# Altium PCB Asserv_2.PcbDoc
Units mil, origin at the board's own origin, x right, y up, seen from the top; angles counter-clockwise.
Board outline 3740 x 1490 mil, 2 copper layers (Top Layer, Bottom Layer); 68 components, 62 nets, 269 pads, 23 vias.
Unrouted connection lines stored in the file: 47.
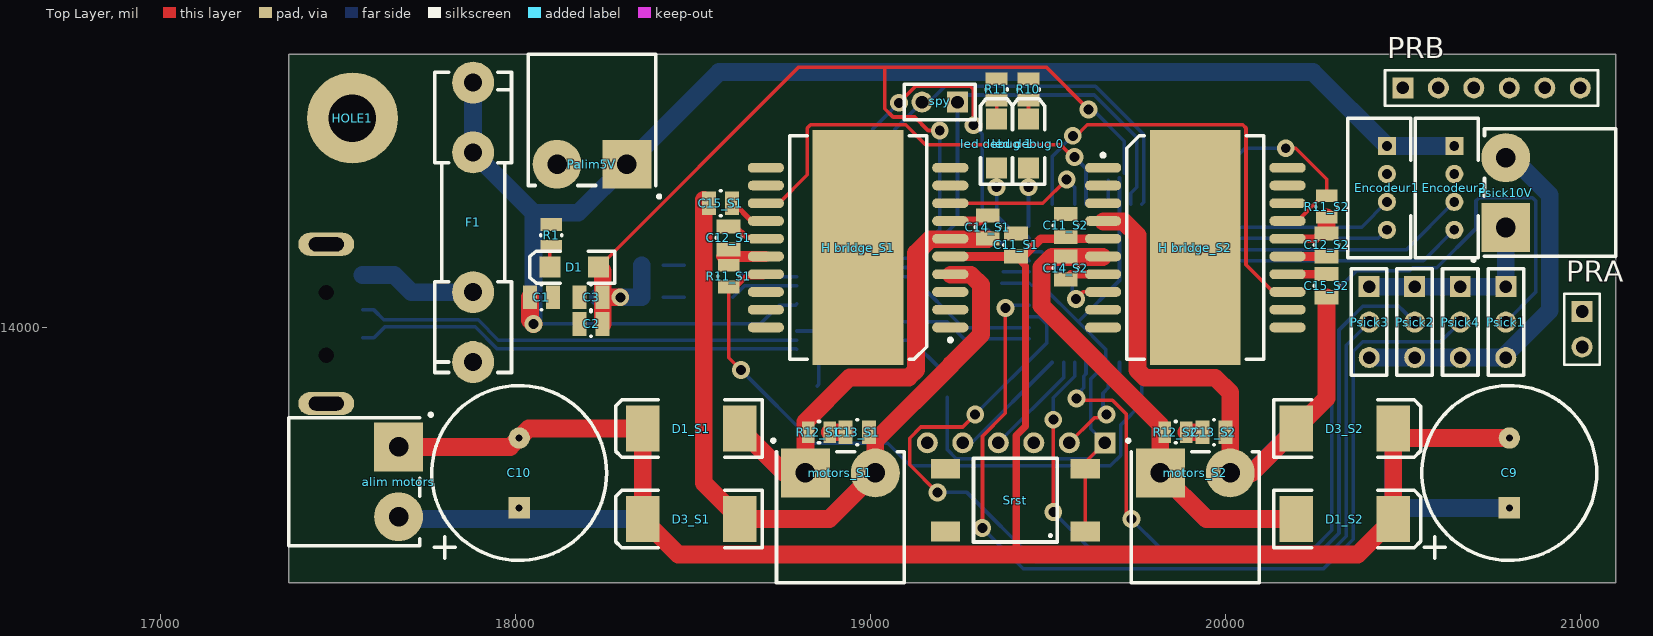
[diagram p0: Top Layer view]
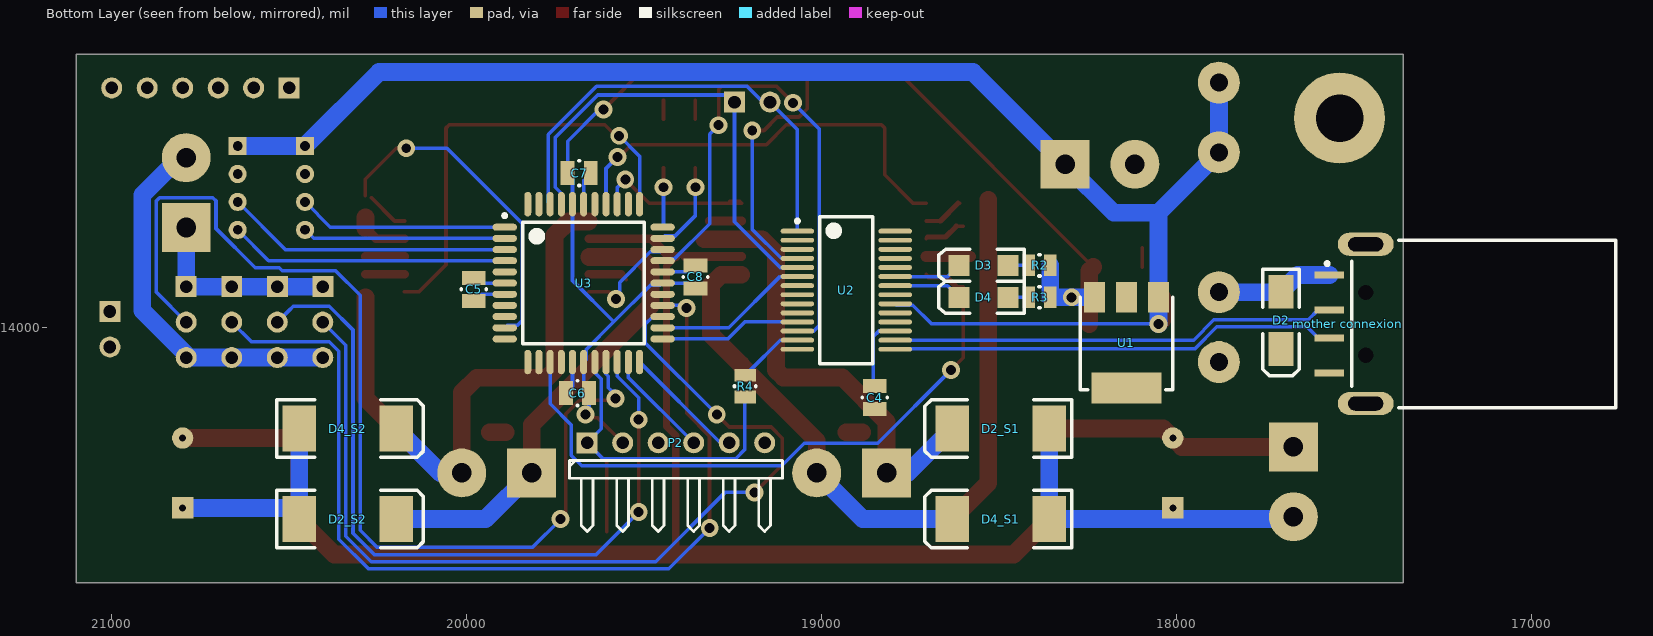
[diagram p1: Bottom Layer view, seen from below]

## Layer stack, top to bottom
Top Layer: signal copper 1.4
Dielectric: dielectric 12.6, FR-4, Dk 4.8
Bottom Layer: signal copper 1.4

## Board outline
17360,13280 21100,13280 21100,14770 17360,14770

## Design rules (kind name [scope] priority, off if disabled: settings)
Clearance [All] p1: gap=10
HoleSize [All] p1: absolutevalues=TRUE maxlimit=140 minlimit=1 maxpercent=80.000 minpercent=20.000
MinimumSolderMaskSliver [All] p1: minsoldermaskwidth=1
PolygonConnect [All] p1: connectstyle=Relief reliefconductorwidth=10 reliefentries=4 polygonreliefangle="90 Angle"
RoutingVias [All] p1: holewidth=28 width=50 viastyle="Through Hole" minholewidth=28 minwidth=50 maxholewidth=28 maxwidth=50
SilkToSilkClearance [All] p1: silktosilkclearance=1
SilkscreenOverComponentPads [All] p1: minsilkscreentomaskgap=1
SolderMaskExpansion [All] p1: expansion=4
Width [All] p1: maxlimit=100 minlimit=10 preferedwidth=10
24 further rules are at their usual default settings.

## Classes and differential pairs
channel class motors1-bridge: S1 S2
net class PWM[1..2]: PWM1 PWM2
net class DIRB[1..2]: DIRB1 DIRB2
net class DIRA[1..2]: DIRA1 DIRA2
component class S2: C11_S2 C12_S2 C13_S2 C14_S2 C15_S2 D1_S2 D2_S2 D3_S2 D4_S2 motors_S2 R11_S2 R12_S2
component class S1: C11_S1 C12_S1 C13_S1 C14_S1 C15_S1 D1_S1 D2_S1 D3_S1 D4_S1 "H bridge_S1" motors_S1 R11_S1 R12_S1
component class asserv1: "alim motors" C1 C2 C3 C4 C5 C6 C7 C8 C9 C10 D1 D2 D3 D4 Encodeur1 Encodeur2 F1 HOLE1 "led debug 0" "led debug 1" "mother connexion" P2 Palim5V PRA PRB Psick1 Psick2 Psick3 Psick4 Psick10V R1 R2 R3 R4 R10 R11 spy U1 U2 U3

## Components (designator, comment, footprint, x,y, rotation, side; value= is the part's Value field where it differs from the comment)
"alim motors" "Bornier" "Bornier male coude 2 voies" 17670,13565 r270 top
C1 "" C0805C 18040,14085 r0 top
C2 "" C0805C 18245,14010 r180 top
C3 "" C0805C 18245,14085 r180 top
C4 "" C0805C 18850,13770 r90 bottom
C5 "" C0805C 19980,14075 r90 bottom
C6 "" C0805C 19655,13815 r0 bottom
C7 "" C0805C 19715,14435 r180 bottom
C8 "" C0805C 19355,14110 r90 bottom
C9 "CAP" "Capacitor axial leaded" 20800,13590 r90 top
C10 "CAP" "Capacitor axial leaded" 18010,13590 r90 top
C11_S1 "CAP" C0805C 19410,14265 r270 top (schematic designator C11)
C11_S2 "CAP" C0805C 19550,14320 r270 top (schematic designator C11)
C12_S1 "CAP" C0805C 18600,14220 r90 top (schematic designator C12)
C12_S2 "CAP" C0805C 20285,14265 r270 top (schematic designator C12)
C13_S1 "CAP" C0805C 18930,13705 r0 top (schematic designator C13)
C13_S2 "CAP" C0805C 19935,13705 r0 top (schematic designator C13)
C14_S1 "CAP" C0805C 19330,14315 r270 top (schematic designator C14)
C14_S2 "CAP" C0805C 19550,14135 r90 top (schematic designator C14)
C15_S1 "CAP" C0805C 18610,14350 r180 top (schematic designator C15)
C15_S2 "CAP" C0805C 20285,14150 r270 top (schematic designator C15)
D1 "LED2" LED1206G 18165,14170 r180 top
D1_S1 "Diode" DSO-C2/X3.3 18495,13715 r180 top (schematic designator D1)
D1_S2 "Diode" DSO-C2/X3.3 20336.22,13460 r0 top (schematic designator D1)
D2 "ZENER/5.6V" DSO-C2/X1.8 17705,14020 r270 bottom
D2_S1 "Diode" DSO-C2/X3.3 18495,13715 r0 bottom (schematic designator D2)
D2_S2 "Diode" DSO-C2/X3.3 20335,13460 r180 bottom (schematic designator D2)
D3 "LED2" LED1206Y 18543.19,14175 r0 bottom
D3_S1 "Diode" DSO-C2/X3.3 18495,13460 r180 top (schematic designator D3)
D3_S2 "Diode" DSO-C2/X3.3 20336.22,13715 r0 top (schematic designator D3)
D4 "LED2" LED1206Y 18543.19,14085 r0 bottom
D4_S1 "Diode" DSO-C2/X3.3 18495,13460 r0 bottom (schematic designator D4)
D4_S2 "Diode" DSO-C2/X3.3 20335,13715 r180 bottom (schematic designator D4)
Encodeur1 "JST" B4B-PH-K-S 20455,14511.22 r270 top
Encodeur2 "JST" B4B-PH-K-S 20645,14511.22 r270 top
F1 "200mA" "Fuse Holder 5x20mm" 17880,14690 r270 top
"H bridge_S1" "L6201P" PowerSO20_M 18965,14225 r180 top (schematic designator "H bridge")
"H bridge_S2" "L6201P" PowerSO20_M 19915,14225 r0 top (schematic designator "H bridge")
HOLE1 "Hole" SCREW 17540,14590 r180 top
"led debug 0" "LED" LED1206R 19445,14518.19 r90 top
"led debug 1" "LED" LED1206R 19355,14518.19 r90 top
"mother connexion" "USB male" "USB SM2.5 Male" 17360,14010 r180 bottom
motors_S1 "Bornier" "Bornier male coude 2 voies" 18915,13590 r0 top (schematic designator motors)
motors_S2 "Bornier" "Bornier male coude 2 voies" 19915,13590 r0 top (schematic designator motors)
P2 "PICkit" HDR1X6H 19660,13675 r180 bottom
Palim5V "Header 2" "Bornier male coude 2 voies" 18215,14460 r180 top
PRA "portA" HDR1X2 21005,14045 r270 top
PRB "portB" HDR1X6 20500,14675 r0 top
Psick1 "capteurs sick" HDR1X3 20790,14115 r270 top
Psick2 "capteurs sick" HDR1X3 20533.33,14115 r270 top
Psick3 "capteurs sick" HDR1X3 20405,14115 r270 top
Psick4 "capteurs sick" HDR1X3 20661.67,14115 r270 top
Psick10V "alim sick" "Bornier male coude 2 voies" 20790,14380 r90 top
R1 "" C0805R 18100,14290 r270 top
R2 "" C0805R 18416.02,14175 r180 bottom
R3 "" C0805R 18416.02,14085 r180 bottom
R4 "" C0805R 19215,13865 r270 bottom
R10 "" C0805R 19445,14640 r90 top
R11 "" C0805R 19355,14640 r90 top
R11_S1 "RES" C0805R 18600,14175 r270 top (schematic designator R11)
R11_S2 "RES" C0805R 20285,14310 r90 top (schematic designator R11)
R12_S1 "RES" C0805R 18885,13705 r180 top (schematic designator R12)
R12_S2 "RES" C0805R 19890,13705 r180 top (schematic designator R12)
spy "Header 2" HDR1X2 19245,14635 r180 top
Srst "SPST-NO" SPST-NO 19605,13425 r90 top
U1 "LM2937IMP-3.3" SOT223 18050,14085 r0 bottom
U2 "FT232RL" SSOP-28_M 18930,14105 r180 bottom
U3 "DSPIC33FJ64MC804-I/PT" TQFP-PT44_N 19670,14125 r180 bottom

## Footprints (in the part's own frame and the unit in brackets; to place one, negate y for a bottom-side part, rotate by r counter-clockwise, add the part's x,y. Pads: shape width x height; smd on the part's side, far side on the other; paste and mask are expansions set on the pad)
B4B-PH-K-S [mm] "JST Header 4 pins Straight"
  rect 1.3x1.3 hole 0.7: 1(0,0)
  round 1.3 hole 0.7: 2(2,0) 3(4,0) 4(6,0)
  silkscreen extent -2,-2.8 8,1.7, body extent -1.95,-2.8 7.95,1.7, height 6
"Bornier male coude 2 voies" [mm] "Bornier male coude 2 voies 12A. Pas 5mm (model : CTB9350/2A) -- 3D FAUSSE"
  rect 3.5x3.5 hole 1.4: 1(-2.5,0)
  round 3.5 hole 1.4: 2(2.5,0)
  silkscreen extent -4.9,-7.87 4.57,2.41, body extent -4.2,-7.93 4.2,1.27, height 7.25
C0805C [mm]
  rect 1x1.7 smd: 1(0,0) 2(1.65,0)
  silkscreen extent 0.8,-0.89 0.85,0.89, body extent -0.21,-0.61 1.79,0.64, height 0.78
C0805R [mm]
  rect 0.9x1.55 smd: 1(0,0) 2(1.55,0)
  silkscreen extent 0.73,-0.76 0.81,0.76, body extent -0.24,-0.62 1.76,0.63, height 0.78
"Capacitor axial leaded" [mil] "height x diam 20mm x 12.5mm"
  rect 60x60 hole 19.68: 1(-98.43,0)
  round 60 hole 19.68: 2(98.43,0)
  silkscreen extent -246,-246 246,246, body extent -246,-246 244,246, height 788
DSO-C2/X1.8 [mm] "Diode; DO-214-AC/SMA; 2 C-Bend Leads; Body 5 x 2.7 mm, inc. leads (LxW)"
  rect 2.4x1.8 smd: A(2.05,0) K(-2.05,0)
  silkscreen extent -3.65,-1.3 3.95,1.3, body extent -2.74,-1.4 2.74,1.4, height 2.28
DSO-C2/X3.3 [mm] "DO-214-AB/SMC; 2 C-Bend Leads; Body 7.9 x 5.9 mm, inc. leads (LxW)"
  rect 2.4x3.3 smd: A(-3.475,0) K(3.475,0)
  silkscreen extent -5.07,-2.05 5.43,2.05, body extent -4.06,-3.15 4.06,3.15, height 2.67
"Fuse Holder 5x20mm" [mm] "Schurter Fuse Holder 0751.0110"
  round 3 hole 1.3: 1(0,0) 1(5,0) 2(15,0) 2(20,0)
  silkscreen extent -0.75,-2.75 20.75,2.75, body extent -0.51,-3.1 20.58,3.1, height 9.86
HDR1X2 [mm] "Connector; Header; 2 Position"
  rect 1.5x1.5 hole 0.9: 1(0,0)
  round 1.5 hole 0.9: 2(2.54,0)
  silkscreen extent -1.27,-1.27 3.81,1.27, body extent -1.17,-1.25 3.91,1.25, height 8.2
HDR1X3 [mm] "Connector; Header; 3 Position"
  rect 1.5x1.5 hole 0.9: 1(0,0)
  round 1.5 hole 0.9: 2(2.54,0) 3(5.08,0)
  silkscreen extent -1.27,-1.27 6.35,1.27, body extent -1.17,-1.25 6.45,1.25, height 8.2
HDR1X6 [mm] "Connector; Header; 6 Position"
  rect 1.5x1.5 hole 0.9: 1(0,0)
  round 1.5 hole 0.9: 2(2.54,0) 3(5.08,0) 4(7.62,0) 5(10.16,0) 6(12.7,0)
  silkscreen extent -1.27,-1.27 13.97,1.27, body extent -1.17,-1.25 14.07,1.25, height 8.2
HDR1X6H [mm] "Connector; Header; 6 Position; Right Angle"
  rect 1.5x1.5 hole 0.9: 1(0,0)
  round 1.5 hole 0.9: 2(2.54,0) 3(5.08,0) 4(7.62,0) 5(10.16,0) 6(12.7,0)
  silkscreen extent -1.27,-6.35 13.97,-1.27, body extent -1.17,-5.85 13.87,1.25, height 5.42
LED1206G [mm] "SMT LED; 2 Flat Leads; 3.2X1.6X1.1"
  rect 1.5x1.5 smd: 1(-1.75,0) 2(1.75,0)
  silkscreen extent -2.9,-1.15 3.2,1.15, body extent -1.6,-0.8 1.6,0.8, height 1.11
LED1206R [mm] "SMT LED; 2 Flat Leads; 3.2X1.6X1.1"
  rect 1.5x1.5 smd: 1(-1.75,0) 2(1.75,0)
  silkscreen extent -2.9,-1.15 3.2,1.15, body extent -1.6,-0.8 1.6,0.8, height 1.11
LED1206Y [mm] "SMT LED; 2 Flat Leads; 3.2X1.6X1.1"
  rect 1.5x1.5 smd: 1(-1.75,0) 2(1.75,0)
  silkscreen extent -2.9,-1.15 3.2,1.15, body extent -1.6,-0.8 1.6,0.8, height 1.11
PowerSO20_M [mm] "SOP, 20-Leads, Body 15.9x11mm, Pitch 1.27mm, IPC Low Density"
  oval 2.6x0.7 smd: 1(-6.6,5.715) 2(-6.6,4.445) 3(-6.6,3.175) 4(-6.6,1.905) 5(-6.6,0.635) 6(-6.6,-0.635) 7(-6.6,-1.905) 8(-6.6,-3.175) 9(-6.6,-4.445) 10(-6.6,-5.715) 11(6.6,-5.715) 12(6.6,-4.445) 13(6.6,-3.175) 14(6.6,-1.905) 15(6.6,-0.635) 16(6.6,0.635) 17(6.6,1.905) 18(6.6,3.175) 19(6.6,4.445) 20(6.6,5.715)
  rect 6.5x16.8 smd: 21(0,0)
  silkscreen extent -6.73,-8 4.9,8, body extent -7.2,-8 7.2,8, height 3.6
SCREW [mm] "Mounting Hole M3"
  round 6.5 hole 3.4: 1(0,0)
  body extent -2.89,-2.52 2.89,2.52, height 10
SOT223 [mm]
  rect 1.5x2.2 smd: 1(0,0) 2(2.3,0) 3(4.6,0)
  rect 5x2.2 smd: ""(2.3,6.5)
  silkscreen extent -1,0 5.6,6.6, body extent -0.95,-0.2 5.55,6.8, height 1.64
SPST-NO [mm] "Tactile Switch SPST-NO 6x6mm"
  rect 1.4x2.1 smd: 1(0,0) 2(4.5,0) 3(4.5,10) 4(0,10)
  silkscreen extent -0.75,2 5.25,8, body extent -0.75,0.93 5.25,9.08, height 5
SSOP-28_M [mm] "SOP, 28-Leads, Body 10.2x5.3mm, Pitch 0.65mm, IPC Low Density"
  oval 2.4x0.35 smd: 1(-3.5,4.225) 2(-3.5,3.575) 3(-3.5,2.925) 4(-3.5,2.275) 5(-3.5,1.625) 6(-3.5,0.975) 7(-3.5,0.325) 8(-3.5,-0.325) 9(-3.5,-0.975) 10(-3.5,-1.625) 11(-3.5,-2.275) 12(-3.5,-2.925) 13(-3.5,-3.575) 14(-3.5,-4.225) 15(3.5,-4.225) 16(3.5,-3.575) 17(3.5,-2.925) 18(3.5,-2.275) 19(3.5,-1.625) 20(3.5,-0.975) 21(3.5,-0.325) 22(3.5,0.325) 23(3.5,0.975) 24(3.5,1.625) 25(3.5,2.275) 26(3.5,2.925) 27(3.5,3.575) 28(3.5,4.225)
  silkscreen extent -3.63,-5.25 1.9,5.25, body extent -3.91,-5.1 3.91,5.1, height 1.98
TQFP-PT44_N [mm] "Thin QFP, 44-Leads, Body 10x10mm, Pitch 0.8mm, IPC Medium Density"
  oval 1.75x0.5 smd: 1(-5.65,4) 2(-5.65,3.2) 3(-5.65,2.4) 4(-5.65,1.6) 5(-5.65,0.8) 6(-5.65,0) 7(-5.65,-0.8) 8(-5.65,-1.6) 9(-5.65,-2.4) 10(-5.65,-3.2) 11(-5.65,-4) 23(5.65,-4) 24(5.65,-3.2) 25(5.65,-2.4) 26(5.65,-1.6) 27(5.65,-0.8) 28(5.65,0) 29(5.65,0.8) 30(5.65,1.6) 31(5.65,2.4) 32(5.65,3.2) 33(5.65,4)
  oval 0.5x1.75 smd: 12(-4,-5.65) 13(-3.2,-5.65) 14(-2.4,-5.65) 15(-1.6,-5.65) 16(-0.8,-5.65) 17(0,-5.65) 18(0.8,-5.65) 19(1.6,-5.65) 20(2.4,-5.65) 21(3.2,-5.65) 22(4,-5.65) 34(4,5.65) 35(3.2,5.65) 36(2.4,5.65) 37(1.6,5.65) 38(0.8,5.65) 39(0,5.65) 40(-0.8,5.65) 41(-1.6,5.65) 42(-2.4,5.65) 43(-3.2,5.65) 44(-4,5.65)
  silkscreen extent -5.77,-4.35 4.35,4.95, body extent -6,-6 6,6, height 1.05
"USB SM2.5 Male" [mm] "USB/SM2.5-4H4; Male USB Connector; USB1.1, Type A, SM; 4 Position; Right Angle"
  rect 2.1x0.5 smd: 1(-5.3,3.5) 2(-5.3,1) 3(-5.3,-1) 4(-5.3,-3.5)
  oval 4x1.65 hole 1 slot 2.5 at 0 deg: 5(-2.7,-5.7) 6(-2.7,5.7)
  round 0.8 hole 1.1 unplated: MH1(-2.7,-2.25) MH2(-2.7,2.25)
  silkscreen extent -5.58,-6 15.2,6, body extent -3.5,-6 14.83,6, height 4.5

## Part data
"alim motors" motors_S1 motors_S2 PRA Psick10V: library part "Header 2", "Header, 2-Pin"
C1 C2 C3 C4 C5 C6 C7 C8: library part "Cap Semi", "Capacitor (Semiconductor SIM Model)"
C9 C10 C11_S1 C11_S2 C12_S1 C12_S2 C13_S1 C13_S2 C14_S1 C14_S2 C15_S1 C15_S2: "Capacitor"
D1 D3 D4: "Typical RED, GREEN, YELLOW, AMBER GaAs LED"
D1_S1 D1_S2 D2_S1 D2_S2 D3_S1 D3_S2 D4_S1 D4_S2: "Default Diode"
D2: library part ZENER, "ZENER"
Encodeur1 Encodeur2: library part "Header 4", "Header, 4-Pin"
F1: library part FUSE1
"H bridge_S1" "H bridge_S2": "DMOS Full Bridge Driver"
HOLE1: "Mounting Hole for screws"
"led debug 0" "led debug 1": library part LED2, "Typical RED, GREEN, YELLOW, AMBER GaAs LED"
"mother connexion": library part "USB Con", "USB Connector"
P2: library part "Header ICSP", "Header, 6-Pin, Right Angle"
Palim5V spy: "Header, 2-Pin"
PRB: library part "Header 6", "Header, 6-Pin"
Psick1 Psick2 Psick3 Psick4: library part "Header 3", "Header, 3-Pin"
R1 R2 R3 R4 R10 R11: library part Res3, "Resistor"
R11_S1 R11_S2 R12_S1 R12_S2: "Resistor"
Srst: "Tactile Switch 7.3mm, SMD"
U1: "500 mA Low Dropout Regulator"
U2: "USB UART Asynchronous Serial Data Transfer Chip, SSOP-28, Tube"
U3: "High-Performance 16-bit Digital Signal Controller, 64 KB Flash, 16 KB RAM, 44-Pin TQFP, Industrial Temperature"

## Via types
v1: diameter 50, hole 28, Top Layer to Bottom Layer, 23 vias

## Nets (pads, with @x,y where several pads share a name; then routed paths per layer and width w, separated by ;. In a path a pad name is that pad's centre, name@x,y a point inside that pad or via, vN(x,y) a via of type N, cw(c..) or ccw(c..) an arc to the next point about the centre after c; other vN are vias at no path point)
+3V3: C2.1 C3.1 C6.1 C7.1 C8.1 D1.1 P2.2 R2.2 R3.2 U1.3 U2.4 U3.17 U3.28 U3.40 | length 4206.5
  Top Layer w10: D1.1 18797.64,14733.74 19040,14733.74 ; v1(19195,14555) 19162.03,14555 19124.06,14592.97 19063.43,14592.97 19040,14616.4 19040,14733.74 ; P2.2 19630,13745 19655,13745 v1(19665,13755) ; v1(19614.22,14614.22) 19494.69,14733.74 19040,14733.74
  Top Layer w50: D1.1 18245,14158.9 C3.1 ; C2.1 C3.1 ; v1(18295,14085) C3.1
  Bottom Layer w10: U2.4 19113.52,14194.57 19195,14276.05 v1(19195,14555) ; C8.1@19370,14125 U3.28 ; U3.28@19454.21,14118.35 19482.46,14118.35 19585,14015.8 ; v1(19614.22,14614.22) 19625.78,14614.22 19715,14525 C7.1 ; v1(19665,13755) 19655,13765 C6.1 19670,13830 U3.17 19663.35,13909.21 19663.35,13937.46 19585,14015.8 ; C7.1@19701.5,14421.5 U3.40 19701.5,14132.3 19585,14015.8
  Bottom Layer w50: U1.3 v1(18295,14085) R3.2 R2.2
+5V0: C1.1 Encodeur1.1 Encodeur2.1 F1.1 Palim5V.1 U1.1 U2.20 | length 4440.7
  Top Layer w50: C1.1 18040,14020 v1(18050,14010)
  Bottom Layer w10: v1(18050,14010) 18689.87,14010 18742.78,14062.91 18788.5,14062.91 U2.20
  Bottom Layer w50: F1.1@17880,14690 17880,14493.15 18050,14323.15 ; v1(18050,14010) U1.1 18050,14323.15 ; 18572.95,14719.53 Palim5V.1 18176.57,14323.15 18050,14323.15 ; 18572.95,14720 20246.69,14720 ; 20246.69,14719.53 Encodeur1.1 Encodeur2.1
+10V0: Psick1.1 Psick2.1 Psick3.1 Psick4.1 Psick10V.1 | length 551.6
  Bottom Layer w50: Psick3.1 Psick2.1 Psick4.1 Psick1.1 Psick10V.1
+30V: "alim motors.1" "H bridge_S1.5" "H bridge_S2.5" C9.2 C10.2 C11_S1.2 C11_S2.2 D1_S1.K D1_S2.K D3_S1.K D3_S2.K | length 5028
  Top Layer w20: C11_S1.2 19436.54,14173.5 19436.54,13721.58 19410.47,13695.51 19410.47,13360.51
  Top Layer w25: 19224.84,14200 C11_S1.2@19384.96,14200 ; C11_S1.2 19430.01,14200.04 19479.97,14250 19655.16,14250
  Top Layer w50: 17670,13663.43 17985,13663.43 C10.2 18036.57,13715 D1_S1.K D3_S1.K 18458.15,13360.04 20373.07,13360.04 D1_S2.K D3_S2.K ; D3_S2.K@20476.46,13688.43 C9.2
A1: Encodeur1.3 U3.1 | length 592.1
  Bottom Layer w10: U3.1 20383.74,14282.48 Encodeur1.3
A2: Encodeur2.3 U3.3 | length 808.2
  Bottom Layer w10: U3.3 20510.75,14219.49 Encodeur2.3
B1: Encodeur1.4 U3.2 | length 572.5
  Bottom Layer w10: U3.2 20430.98,14250.98 Encodeur1.4
B2: Encodeur2.4 U3.4 | length 788.6
  Bottom Layer w10: U3.4 20557.99,14187.99 Encodeur2.4
CLK12: U2.12 U3.30 | length 1523.7
  Top Layer w10: v1(19080,14632.97) 19126.56,14679.53 19280.74,14679.53 19289.53,14670.74 19289.53,14570.47 v1(19290,14570)
  Bottom Layer w10: U2.12 19067.64,13990 19021.92,13990 19005.55,14006.37 19005.55,14558.52 v1(19080,14632.97) ; v1(19290,14570) 19315,14545 19315,14324.32 19315,14292.31 19414.47,14192.83 19442.72,14192.83 U3.30
D+: "mother connexion.3" U2.15 | length 1262.4
  Bottom Layer w10: 17568.66,13970.63 17600.63,13970.63 17631.54,14001.54 17885.79,14001.54 17947.33,13940 18790.87,13940 U2.15
D-: "mother connexion.2" U2.16 | length 1258.8
  Bottom Layer w10: 17568.66,14049.37 17600.63,14049.37 17628.46,14021.54 17894.08,14021.54 17951.36,13964.25 U2.16
DIRA1: "H bridge_S1.8" U3.36 | length 475.5
  Top Layer w10: 19257.94,14355 19229.84,14355 19224.84,14350 19485.63,14350 v1(19552.52,14416.89) v1@19552.52,14422.48
  Bottom Layer w10: v1(19552.52,14416.89) 19553.11,14416.89 19575.51,14394.49 U3.36
DIRA2: "H bridge_S2.8" U3.31 | length 315.1
  Top Layer w10: v1(19579.09,14080.32) 19598.77,14100 19655.16,14100
  Bottom Layer w10: U3.31 19454.21,14212.83 19482.46,14212.83 19568.77,14126.52 19568.77,14070 v1(19579.09,14080.32)
DIRB1: "H bridge_S1.13" U3.37 | length 1224
  Top Layer w10: 18705.16,14350 18742.05,14350 18822.05,14430 18822.05,14561.92 18830.83,14570.71 19099.29,14570.71 19155,14515 19535,14515 19572.5,14477.5 v1(19575,14480)
  Bottom Layer w10: v1(19575,14480) 19607.01,14447.99 U3.37
DIRB2: "H bridge_S2.13" U3.34 | length 1258.5
  Top Layer w10: v1(19570,14540) 19575,14535 19610.71,14570.71 20049.17,14570.71 20057.95,14561.92 20057.95,14177.05 20135,14100 20174.84,14100
  Bottom Layer w10: U3.34 19512.52,14482.52 v1(19570,14540)
FLUSH: U2.6 U3.24 | length 439.6
  Bottom Layer w10: U2.6 19116.61,14143.39 19260.98,13999.02 U3.24
GND: "alim motors.2" "H bridge_S1.1" "H bridge_S1.10" "H bridge_S1.11" "H bridge_S1.16" "H bridge_S1.20" "H bridge_S2.1" "H bridge_S2.10" "H bridge_S2.11" "H bridge_S2.16" "H bridge_S2.20" "mother connexion.4" C1.2 C2.2 C3.2 C4.1 C5.2 C6.2 C7.2 C8.2 C9.1 C10.1 C11_S1.1 C11_S2.1 C12_S1.1 C12_S2.1 D2.A D2_S1.A D2_S2.A D4_S1.A D4_S2.A Encodeur1.2 Encodeur2.2 P2.3 Palim5V.2 Psick1.3 Psick2.3 Psick3.3 Psick4.3 Psick10V.2 R1.1 R10.2 R11.2 R11_S1.1 R11_S2.1 Srst.3 Srst.4 U1.2 U2.7 U2.18 U2.21 U2.25 U2.26 U3.6 U3.16 U3.29 U3.39 | length 3160.7
  Top Layer w25: 20174.84,14250 20255,14250 C12_S2.1@20285,14280
  Top Layer w30: 18580,14200 18705.16,14200
  Top Layer w50: C12_S2.1@20285,14280 R11_S2.1
  Bottom Layer w10: C8.2@19373.46,14156.5 U3.29 ; U3.39 19670,14415.04 ; C6.2@19701.5,13833.46 U3.16 ; U3.6 19965.04,14125 C5.2
  Bottom Layer w50: 17676.57,13460 D4_S1.A D2_S1.A ; Psick3.3 Psick2.3 Psick4.3 Psick1.3 20790,13923.74 20913.9,14047.64 20913.9,14373.25 20808.73,14478.43 Psick10V.2 ; D2_S2.A D4_S2.A ; D2_S2.A@20475.24,13491.57 C9.1
GPIO: R4.1 U2.13 | length 171.3
  Bottom Layer w10: U2.13 19115.75,13964.25 19201.38,13878.62 R4.1@19201.38,13876.38
MCLR: P2.1 R4.2 Srst.1 Srst.2 U3.18 | length 1145
  Top Layer w10: Srst.1 Srst.2 19605,13620 P2.1
  Bottom Layer w10: R4.2@19215.47,13803.5 19215.47,13656.56 19241.56,13630.47 19615.47,13630.47 P2.1 19620.31,13714.69 19620.31,13854.68 19638.5,13872.87 U3.18
NetC4_2: C4.2 U2.17 | length 209.4
  Bottom Layer w10: U2.17 18792.36,13990 18837.77,13990 18854.45,13973.32 18854.45,13839.41 C4.2
NetC5_1: C5.1 U3.7 | length 69.1
  Bottom Layer w10: U3.7 C5.1@19961.5,14093.5
NetC12_S1_2: "H bridge_S1.15" C12_S1.2 | length 119.6
  Top Layer w10: C12_S1.2 C12_S1.2@18620.04,14284.96 ; 18700.47,14254.69 18705.16,14250
  Top Layer w15: C12_S1.2@18620.04,14284.96 18650.31,14254.69 18700.47,14254.69
NetC12_S2_2: "H bridge_S2.15" C12_S2.2 | length 110.1
  Top Layer w25: 20174.84,14200 C12_S2.2
NetC13_S1_1: C13_S1.1 R12_S1.1 | length 45
  Top Layer w50: R12_S1.1 C13_S1.1
NetC13_S2_1: C13_S2.1 R12_S2.1 | length 45
  Top Layer w50: R12_S2.1 C13_S2.1
NetC14_S1_1: "H bridge_S1.7" C14_S1.1 | length 90.2
  Top Layer w25: 19224.84,14300 C14_S1.1@19315,14300
NetC14_S2_1: "H bridge_S2.7" C14_S2.1 | length 111.4
  Top Layer w10: C14_S2.1 C14_S2.1@19565,14150
  Top Layer w25: C14_S2.1@19565,14150 19655.16,14150
NetC15_S1_1: "H bridge_S1.14" C15_S1.1 | length 115.9
  Top Layer w10: C15_S1.1 C15_S1.1@18615,14350 ; 18665,14300 18705.16,14300
  Top Layer w15: C15_S1.1@18615,14350 18665,14300
NetC15_S2_1: "H bridge_S2.14" C15_S2.1 | length 110.2
  Top Layer w25: 20174.84,14150 C15_S2.1
NetD1_2: D1.2 R1.2 | length 55.1
  Top Layer w10: D1.2 R1.2@18096.1,14225.08
NetD2_K: "mother connexion.1" D2.K F1.2@17880,14099.45 | length 331.4
  Bottom Layer w50: 17568.66,14147.8 17657.91,14147.8 D2.K 17706.26,14099.45 F1.2@17880,14099.45
NetD3_1: D3.1 R2.1 | length 58.3
  Bottom Layer w10: R2.1 D3.1
NetD4_1: D4.1 R3.1 | length 58.3
  Bottom Layer w10: R3.1 D4.1
"Netled debug 0_1": "led debug 0.1" U3.33 | length 167.9
  Top Layer w10: v1(19445,14395) 19445,14449.29
  Bottom Layer w10: U3.33@19445,14285.04 v1(19445,14395) v1@19447.56,14392.44
"Netled debug 0_2": "led debug 0.2" R10.1 | length 52.9
  Top Layer w10: 19445,14587.09 R10.1
"Netled debug 1_1": "led debug 1.1" U3.32 | length 253.2
  Top Layer w10: v1(19355,14395) 19355,14449.29
  Bottom Layer w10: v1(19355,14395) 19355,14315.3 19412.66,14257.64 19440.91,14257.64 U3.32
"Netled debug 1_2": "led debug 1.2" R11.1 | length 52.9
  Top Layer w10: 19355,14587.09 R11.1
NetPRA_1: PRA.1 U3.35
NetPRA_2: PRA.2 U3.12
NetPRB_1: PRB.1 U3.43
NetPRB_2: PRB.2 U3.44
NetPRB_3: PRB.3 U3.8
NetPRB_4: PRB.4 U3.9
NetPRB_5: PRB.5 U3.11
NetPRB_6: PRB.6 U3.15
OUT1_S1: "H bridge_S1.6" C14_S1.2 D1_S1.A D2_S1.K motors_S1.1 R12_S1.2 | length 1537
  Top Layer w50: D1_S1.A 18756.81,13590 motors_S1.1 18816.57,13734.3 18941.57,13859.29 19107.45,13859.29 19127.95,13879.79 19127.95,14209.5 19167.24,14248.78 C14_S1.2@19330,14248.78
  Bottom Layer w50: D2_S1.K 18756.82,13590 motors_S1.1
OUT1_S2: "H bridge_S2.6" C14_S2.2 D1_S2.A D2_S2.K motors_S2.1 R12_S2.2 | length 1774.8
  Top Layer w50: 19653.94,14198.78 19511.13,14198.78 19481.54,14169.18 19481.54,14061.11 19816.57,13726.07 motors_S2.1 19946.57,13460 D1_S2.A
  Bottom Layer w50: motors_S2.1 19946.57,13460 D2_S2.K
OUT2_S1: "H bridge_S1.4" C13_S1.2 C15_S1.2 D3_S1.A D4_S1.K motors_S1.2 | length 2563.4
  Top Layer w50: C15_S1.2@18530,14360 18530,13561.81 D3_S1.A 18883.42,13460 motors_S1.2 19013.43,13680.41 19226.51,13893.49 19226.51,13895.28 19311.02,13979.79 19311.02,14120.21 19282.45,14148.78 19226.06,14148.78
  Bottom Layer w50: D4_S1.K 18883.43,13460 motors_S1.2
OUT2_S2: "H bridge_S2.4" C13_S2.2 C15_S2.2 D3_S2.A D4_S2.K motors_S2.2 | length 1885.6
  Top Layer w50: 19656.38,14298.78 19712.76,14298.78 19752.05,14259.5 19752.05,13879.79 19773.38,13858.46 19971.54,13858.46 20013.43,13816.57 motors_S2.2 20074.41,13590 D3_S2.A 20285,13800.59 C15_S2.2
  Bottom Layer w50: motors_S2.2 20073.19,13590 D4_S2.K
PGEC: P2.5 U3.22 | length 346.8
  Bottom Layer w10: P2.5 19284.96,13675 U3.22
PGED: P2.4 U3.21 | length 303.8
  Bottom Layer w10: P2.4 19544.02,13859.02 U3.21
PWM1: "H bridge_S1.17" R11_S1.2 U3.14 | length 1850.2
  Top Layer w10: R11_S1.2@18618.98,14113.98 R11_S1.2 18600,13915 v1(18635,13880) ; 18697.44,14142.28 18705.16,14150
  Top Layer w15: R11_S1.2@18618.98,14113.98 18647.28,14142.28 18697.44,14142.28
  Bottom Layer w10: v1(18635,13880) 18841.1,13673.9 19048.18,13673.9 19112.07,13610 19675.27,13610 19704.53,13639.26 19704.53,13725.2 19764.49,13785.16 U3.14
PWM2: "H bridge_S2.17" R11_S2.2 U3.10 | length 1065.2
  Top Layer w10: v1(20170,14505) 20197.94,14505 20285,14417.94 R11_S2.2 ; 20174.84,14300 20202.94,14300 R11_S2.2@20268.97,14366.03
  Bottom Layer w10: U3.10 19885.79,14005.67 19857.54,14005.67 19842.99,14020.22 19842.99,14292.77 20055.22,14505 v1(20170,14505)
RTS: U2.11 U3.23 | length 399.6
  Bottom Layer w10: U2.11 19216.28,14015.43 19264.2,13967.52 19292.48,13967.52 U3.23
RX: spy.2 U2.1 U3.42 | length 1293.6
  Bottom Layer w10: U2.1 19067.8,14557.8 spy.2 19164.73,14635 19209.73,14680 19625.47,14680 ; 19625.47,14679.53 19633.76,14679.53 19769.69,14543.6 19769.69,14352.64 U3.42
RXLED: D3.2 U2.23 | length 193.2
  Bottom Layer w10: D3.2 18643.7,14143.39 U2.23
SICK1: Psick1.2 U3.19 | length 2962.3
  Top Layer w10: v1@19580,13820 19605,13795 19681.57,13795 19720,13756.57 19720,13475 v1(19735,13460)
  Bottom Layer w10: v1@19580,13820 19590,13820 19600.31,13830.31 19600.31,13862.96 19607.01,13869.65 U3.19 ; v1(19735,13460) 19814.96,13380.04 20251.65,13380.04 20300,13428.39 20300,14090.27 20369.26,14159.53 20519.53,14159.53 20527.99,14167.99 20595.4,14167.99 20706.1,14278.7 20706.1,14356.69 20714.89,14365.47 20865.11,14365.47 20873.9,14356.69 20873.9,14098.9 Psick1.2
  other v1: 19580,13800
SICK2: Psick2.2 U3.20 | length 2159.4
  Top Layer w10: v1(19515,13480) v1(19515,13740)
  Bottom Layer w10: v1(19515,13480) 19634.96,13360.04 20259.93,13360.04 20320,13420.11 20320,13992.97 20386.56,14059.53 20488.81,14059.53 20500.47,14047.86 Psick2.2 ; v1(19515,13740) 19515,13801.72 19575.51,13862.23 U3.20
SICK3: Psick3.2 U3.25 | length 2686.5
  Top Layer w10: v1(19188.35,13535) 19110,13613.35 19110,13687.97 19141.56,13719.53 19259.31,13719.53 v1(19294.78,13755)
  Bottom Layer w10: v1(19188.35,13535) 19271.57,13535 19466.53,13340.04 20268.21,13340.04 20340,13411.82 20340,13950 Psick3.2 ; v1(19294.78,13755) 19497.01,13957.23 19497.01,14009.31 19475.8,14030.51 U3.25
SICK4: Psick4.2 U3.26 | length 2724.7
  Top Layer w10: v1(19315,13435) 19315.47,13435.47 19315.47,13693.44 19380,13757.97 v1(19380,14055)
  Bottom Layer w10: v1(19315,13435) 19429.96,13320.04 20276.5,13320.04 20360,13403.54 20360,13932.97 20386.56,13959.53 20606.19,13959.53 Psick4.2 ; v1@19372.01,14062.01 v1@19372.99,14062.01 ; v1(19380,14055) v1@19372.99,14062.01 ; U3.26 v1@19372.99,14062.01
TX: spy.1 U2.5 U3.41 | length 1325.1
  Bottom Layer w10: U2.5 19116.21,14168.98 19245,14297.77 spy.1 19265,14655 19630,14655 19749.69,14535.31 19749.69,14395.32 19732.99,14378.63 U3.41
TXLED: D4.2 U2.22 | length 193.7
  Bottom Layer w10: D4.2 18644.88,14117.8 U2.22
pads on no net: "H bridge_S1.2" "H bridge_S1.3" "H bridge_S1.9" "H bridge_S1.12" "H bridge_S1.18" "H bridge_S1.19" "H bridge_S1.21" "H bridge_S2.2" "H bridge_S2.3" "H bridge_S2.9" "H bridge_S2.12" "H bridge_S2.18" "H bridge_S2.19" "H bridge_S2.21" "mother connexion.5" "mother connexion.6" "mother connexion.MH1" "mother connexion.MH2" F1.2@17880,13902.6 HOLE1.1 P2.6 U1. U2.2 U2.3 U2.8 U2.9 U2.10 U2.14 U2.19 U2.24 U2.27 U2.28 U3.5 U3.13 U3.27 U3.38

## Silkscreen, mask and mechanical layers (free items; w line width, h text height)
Mechanical 1:
  the board outline again, w10

## Text inside footprints (layer, text, board x,y; h text height)
"mother connexion": Mechanical 1 "PCB Edge" at 17341.4,13806.35 h9.84 r270